# EAGLE board 3PortCentral (EAGLE 7.6.0)
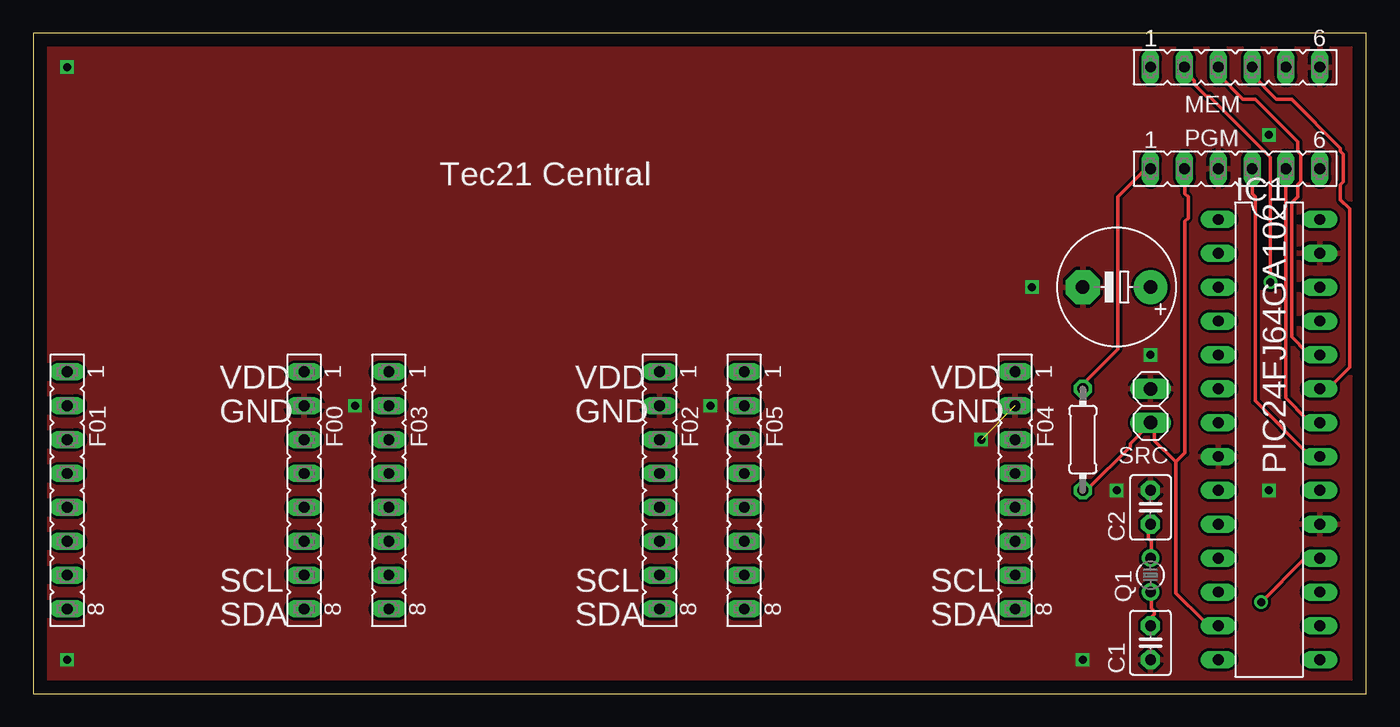
[diagram p0: board, top side]
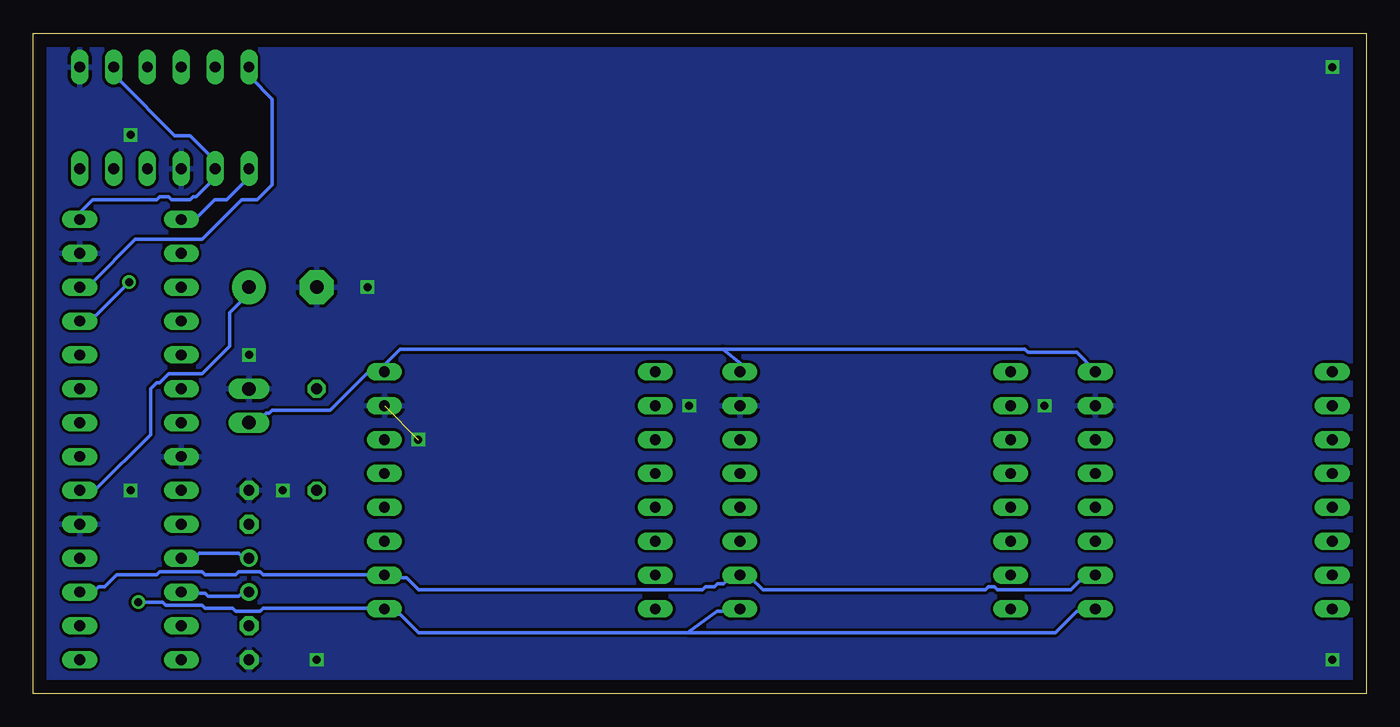
[diagram p1: board, bottom side, seen from below]

Size 100 x 49.52 mm. Coordinates in mm from the lower left corner, seen from the top.
Outline: 0,0 100,0 100,49.52 0,49.52 0,0
Copper layers (1*16): Top 0.035mm / dielectric 1.5mm / Bottom 0.035mm
Design rules "default": minimum track width 10mil, minimum drill 24mil, track to track 8mil, track to pad 8mil, pad to pad 8mil, via to via 8mil, smd to smd 8mil, copper to edge 40mil, drill to drill 8mil, minimum pad ring 10mil, minimum via ring 8mil, stop-mask expansion 4mil, vias tented up to drill 0mil, thermal gap 10mil

## Footprints (pad centres in the part's own frame; a part is rotated, then mirrored left to right if it is on the bottom)
C025-030X050 = drill 0.813 pad 1.422 octagon: 1 -1.27,0; 2 1.27,0
E5-8,5 = drill 1.016 pad 2.54: + -2.54,0 | drill 1.016 pad 2.54 octagon: - 2.54,0
FE08 = drill 0.813 long: 1 -8.89,0; 2 -6.35,0; 3 -3.81,0; 4 -1.27,0; 5 1.27,0; 6 3.81,0; 7 6.35,0; 8 8.89,0
DIL28-3 = drill 0.813 long: 1 -16.51,-3.81; 2 -13.97,-3.81; 3 -11.43,-3.81; 4 -8.89,-3.81; 5 -6.35,-3.81; 6 -3.81,-3.81; 7 -1.27,-3.81; 8 1.27,-3.81; 9 3.81,-3.81; 10 6.35,-3.81; 11 8.89,-3.81; 12 11.43,-3.81; 13 13.97,-3.81; 14 16.51,-3.81; 15 16.51,3.81; 16 13.97,3.81; 17 11.43,3.81; 18 8.89,3.81; 19 6.35,3.81; 20 3.81,3.81; 21 1.27,3.81; 22 -1.27,3.81; 23 -3.81,3.81; 24 -6.35,3.81; 25 -8.89,3.81; 26 -11.43,3.81; 27 -13.97,3.81; 28 -16.51,3.81
FE06 = drill 0.813 long: 1 -6.35,0; 2 -3.81,0; 3 -1.27,0; 4 1.27,0; 5 3.81,0; 6 6.35,0
TC26V = drill 0.813: 1 -1.27,0; 2 1.27,0
0204/7 = drill 0.813 octagon: 1 -3.81,0; 2 3.81,0
1X02 = drill 1.016 long: 1 -1.27,0; 2 1.27,0

## Placement (x,y rotation side)
C1  [C025-030X050]  83.82,3.81 90 top
C2  [C025-030X050]  83.82,13.97 270 top
C4  10uf  [E5-8,5]  81.28,30.48 180 top
F00  [FE08]  20.32,15.24 270 top
F01  [FE08]  2.54,15.24 270 top
F02  [FE08]  46.99,15.24 270 top
F03  [FE08]  26.67,15.24 270 top
F04  [FE08]  73.66,15.24 270 top
F05  [FE08]  53.34,15.24 270 top
IC1  PIC24FJ64GA002  [DIL28-3]  92.71,19.05 270 top
MEM  [FE06]  90.17,46.99 0 top
PGM  [FE06]  90.17,39.37 0 top
Q1  [TC26V]  83.82,8.89 90 top
R1  10k  [0204/7]  78.74,19.05 270 top
SRC  [1X02]  83.82,21.59 90 top

## Library data of the parts
C1 C2 C4 = adafruit
F00 F01-F05 MEM PGM = con-lsta; OC_FARNELL: unknown; OC_NEWARK: unknown
IC1 = microchip; MPN: PIC24FJ64GA002-I/SP; OC_FARNELL: 1332298; OC_NEWARK: 88K6132
Q1 = crystal; OC_FARNELL: unknown; OC_NEWARK: unknown
R1 = resistor
SRC = pinhead

## Nets
GND: C1.1 C2.1 C4.- F00.2 F02.2 F04.2 IC1.8 IC1.19 IC1.27 MEM.6 PGM.3 SRC.2
MISO: IC1.23 MEM.4
MOSI: IC1.24 MEM.3
N$1: IC1.1 PGM.1 R1.1
N$2: C1.2 IC1.12 Q1.1
N$3: C2.2 IC1.11 Q1.2
N$4: IC1.21 PGM.4
N$5: IC1.22 PGM.5
N$6: C4.+ IC1.20
SCL: F00.7 F02.7 F04.7 IC1.17
SDA: F00.8 F02.8 F04.8 IC1.18
SPICK: IC1.25 MEM.2
SS: IC1.26 MEM.1
VDD: F00.1 F02.1 F04.1 IC1.13 IC1.28 MEM.5 PGM.2 R1.2 SRC.1

## Tracks (layer width: path | path; a pad name or v marks a point on that pad's centre or on a via)
GND  (via drill 0.6)  (1 unrouted)
  other vias: 2.54,2.54 2.54,46.99 74.93,30.48 83.82,25.4 78.74,2.54 81.28,15.24 92.71,15.24 92.71,41.91 24.13,21.59 50.8,21.59 71.12,19.05
  pour Top: -1.27,50.8 101.6,50.8 101.6,-1.27 -1.27,-1.27
  pour Bottom: -1.27,50.8 101.6,50.8 101.6,-1.27 -1.27,-1.27
MISO
  Top 0.254: MEM.4 91.44,46.41 93.27,44.58 94.41,44.58 98.07,40.92 98.07,40.69 98.3,40.46 98.3,38.41 98.07,38.18 98.07,37.03 98.75,36.35 98.75,24.46 97.61,23.32 97.16,23.32 96.7,22.86 IC1.23
MOSI
  Top 0.254: IC1.24 96.47,25.6 95.56,25.6 94.41,26.75 94.41,36.8 94.87,37.26 94.87,38.18 95.1,38.41 95.1,40.46 94.87,40.69 94.87,41.38 91.67,44.58 90.75,44.58 88.92,46.41 88.92,46.86 MEM.3
N$1
  Top 0.254: R1.1 78.87,22.86 78.87,23.32 81.38,25.83 81.38,37.26 83.67,39.55 PGM.1
  Bottom 0.254: IC1.1 88.7,35.66 87.78,35.66 86.41,37.03 85.5,37.03 83.9,38.63 83.9,39.32 PGM.1
N$2
  Top 0.254: Q1.1 83.9,7.54 83.9,6.4 84.12,6.17 84.12,5.94 83.9,5.71 83.9,5.26 C1.2
  Bottom 0.254: IC1.12 88.7,7.54 87.1,7.54 86.87,7.32 84.58,7.32 84.35,7.54 83.9,7.54 Q1.1
N$3
  Top 0.254: Q1.2 83.9,10.29 83.9,11.43 83.67,11.66 83.67,12.57 C2.2
  Bottom 0.254: IC1.11 88.7,10.29 87.78,10.29 87.55,10.52 84.58,10.52 84.35,10.29 83.9,10.29 Q1.2
N$4
  Top 0.254: PGM.4 91.44,37.49 91.67,37.26 91.67,21.95 95.56,18.06 95.56,17.83 96.47,17.83 IC1.21
N$5
  Top 0.254: IC1.22 96.47,20.34 95.56,20.34 95.56,20.57 93.95,22.17 93.95,39.32 PGM.5
N$6
  Bottom 0.254: IC1.20 96.47,15.32 95.33,15.32 91.21,19.43 91.21,22.86 90.75,23.32 90.53,23.32 89.84,24 87.33,24 85.27,26.06 85.27,28.57 83.9,29.95 83.9,30.4 C4.+
SCL
  Bottom 0.254: IC1.17 96.47,7.77 95.33,7.77 95.1,8 94.64,8 93.73,8.91 90.75,8.91 90.53,9.14 87.33,9.14 87.1,8.91 84.81,8.91 84.58,9.14 82.98,9.14 82.75,8.91 73.84,8.91 F04.7 73.61,8.69 72.01,8.69 71.09,7.77 49.81,7.77 49.58,8 48.9,8 48.67,8.23 48.23,8.23 47.78,8.69 47.09,8.69 F02.7 46.86,8.69 46.18,8.69 45.26,7.77 28.57,7.77 28.35,8 27.89,8 27.66,7.77 22.17,7.77 21.49,8.46 20.57,8.46 20.34,8.69 F00.7
SDA  (via drill 0.61)
  Top 0.254: v92.13,6.86 95.33,10.06 96.47,10.06 IC1.18
  Bottom 0.254: 50.93,4.57 23.32,4.57 21.72,6.17 20.34,6.17 F00.8 | 50.93,4.57 48.72,6.17 48.13,6.17 F02.8 | 50.93,4.57 71.09,4.57 72.47,5.94 73.38,5.94 73.61,6.17 F04.8 73.84,6.4 82.75,6.4 82.98,6.17 84.81,6.17 85.04,6.4 87.1,6.4 87.33,6.63 90.07,6.63 90.3,6.86 v92.13,6.86
SPICK  (via drill 0.61)
  Top 0.254: v92.81,30.86 92.81,40.23 88.24,44.81 88.01,44.81 87.1,45.72 87.1,45.95 86.41,46.63 86.41,46.86 MEM.2
  Bottom 0.254: v92.81,30.86 95.33,28.35 96.24,28.35 96.47,28.12 IC1.25
SS
  Bottom 0.254: IC1.26 96.47,30.63 96.24,30.86 95.56,30.86 92.35,34.06 87.33,34.06 84.35,37.03 83.21,37.03 82.07,38.18 82.07,44.58 83.67,46.18 83.67,46.86 MEM.1
VDD
  Top 0.254: R1.2 78.87,15.32 79.1,15.32 82.3,18.52 82.3,18.75 83.67,20.12 SRC.1 83.9,20.12 84.12,19.89 84.12,18.97 85.72,17.37 | 85.72,17.37 85.72,7.54 87.78,5.49 87.78,5.26 88.7,5.26 IC1.13 | 85.72,17.37 86.41,18.06 86.41,35.43 86.64,35.66 86.64,37.26 86.41,37.49 86.41,39.32 PGM.2
  Bottom 0.254: 48.26,25.83 25.6,25.83 25.38,25.6 21.72,25.6 20.34,24.23 F00.1 | 48.26,25.83 46.86,24.69 46.86,24.23 F02.1 | IC1.28 96.47,35.66 96.47,36.12 95.56,37.03 90.75,37.03 90.53,37.26 89.84,37.26 89.61,37.03 88.24,37.03 88.01,37.26 87.78,37.26 86.64,38.41 86.41,38.41 86.41,39.32 PGM.2 86.41,39.55 86.41,40.01 88.24,41.83 89.38,41.83 93.5,45.95 93.5,46.41 93.95,46.86 MEM.5 | SRC.1 83.67,20.34 83.21,20.34 82.53,21.03 82.3,21.03 82.07,21.26 77.72,21.26 74.98,24 73.84,24 F04.1 73.61,24.23 73.61,24.69 72.47,25.83 48.26,25.83

## Text on the board
tPlace: Tec21 Central | VDD | VDD | VDD | GND | GND | GND | PIC24FJ64GA102 | SCL | SCL | SCL | SDA | SDA | SDA